# Altium PCB Temp_Sensor_SmallV_8thjune2023.PcbDoc
Units mm, origin at the board's own origin, x right, y up, seen from the top; angles counter-clockwise.
Board outline 18 x 18 mm, 2 copper layers (Top Layer, Bottom Layer); 33 components, 19 nets, 111 pads, 40 vias.
Unrouted connection lines stored in the file: 49.
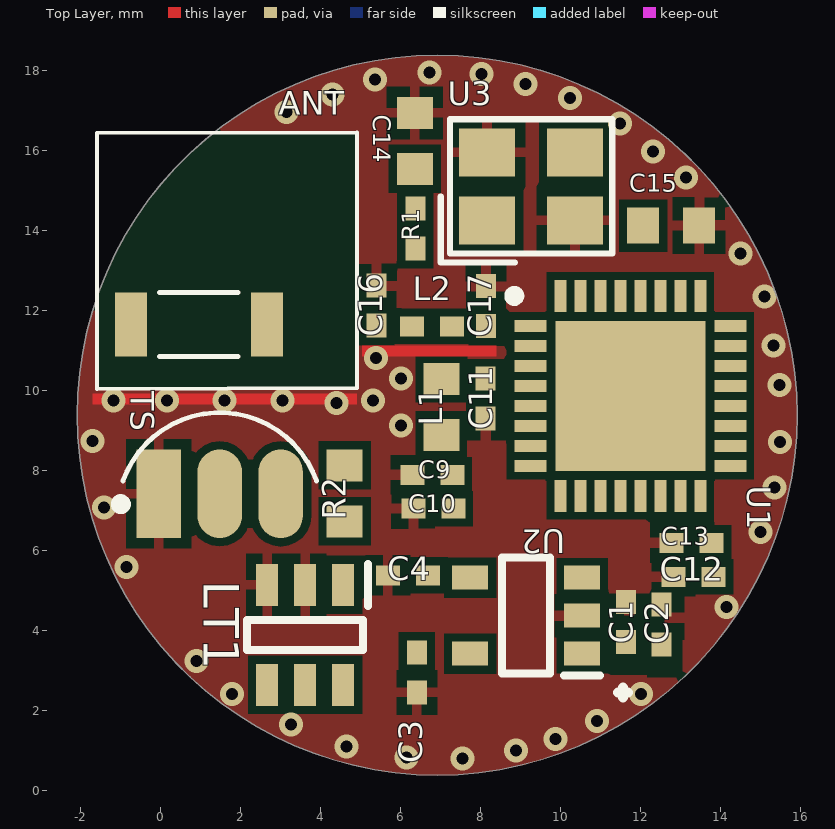
[diagram p0: Top Layer view]
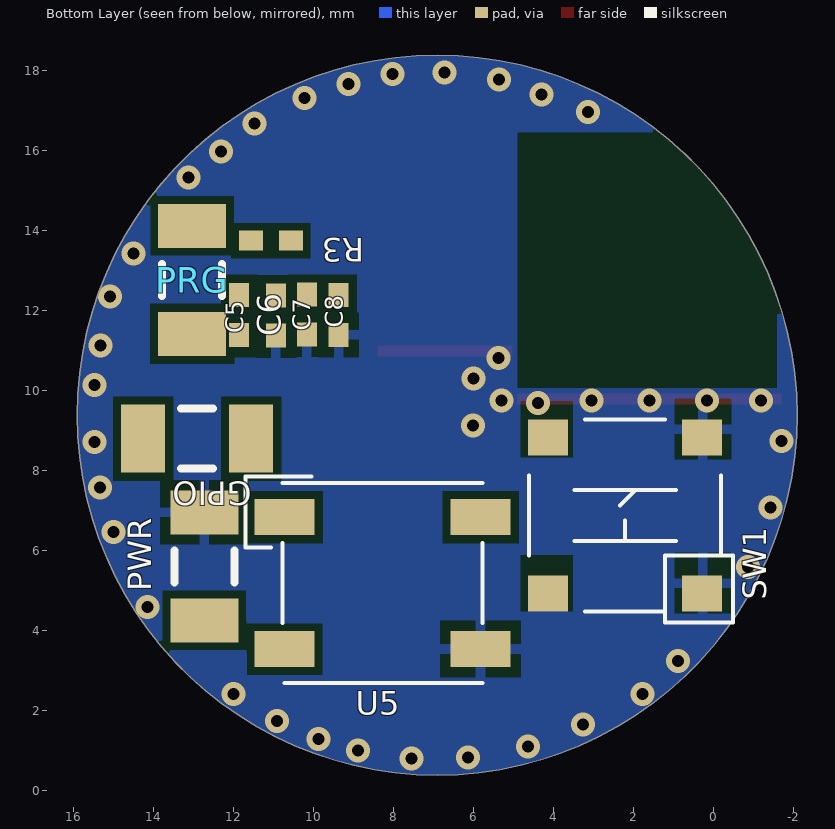
[diagram p1: Bottom Layer view, seen from below]

## Layer stack, top to bottom
Top Solder: solder mask 0.0102, Solder Resist, Dk 3.5
Top Layer: signal copper 0.0356
Dielectric 1: dielectric 0.32, FR-4, Dk 4.8
Bottom Layer: signal copper 0.0356
Bottom Solder: solder mask 0.0102, Solder Resist, Dk 3.5

## Board outline
-2.09,9.39 ccw(c6.91,9.39) 6.91,0.39 ccw(c6.91,9.39) 15.91,9.39 ccw(c6.91,9.39) 6.91,18.39 ccw(c6.91,9.39)

## Design rules (kind name [scope] priority, off if disabled: settings)
Clearance [All] p1: gap=0.2 ignorepadtopadclearanceinfootprint=FALSE except(0: Arc-Hole Track-Hole SMDPad-Hole THPad-Hole Via-Hole Fill-Hole Poly-Hole Region-Hole Text-Hole)
MinimumSolderMaskSliver MinimumSolderMaskSliver_1 [HasFootprint('QFN50P500X500X90-33N-D')] p1: minsoldermaskwidth=0
MinimumSolderMaskSliver [All] p2: minsoldermaskwidth=0
PolygonConnect [All] p1: connectstyle=Relief reliefconductorwidth=0.254 reliefentries=4 polygonreliefangle="90 Angle" airgapwidth=0.254
RoutingVias [All] p1: holewidth=0.711 width=1.27 viastyle="Through Hole" minholewidth=0.711 minwidth=1.27 maxholewidth=0.711 maxwidth=1.27
SilkToSilkClearance [All] p1: silktosilkclearance=0.05
SilkToSolderMaskClearance TO-92-TO92127P495H2044-3 [HasFootprint('TO-92-TO92127P495H2044-3')] p1: minsilkscreentomaskgap=0 clearancetoexposedcopper=TRUE
SilkToSolderMaskClearance [IsPad] p2: minsilkscreentomaskgap=0 clearancetoexposedcopper=TRUE
SolderMaskExpansion [All] p1: expansion=0.102 istentingtop=FALSE
Width [All] p1: maxlimit=0.75 minlimit=0.18 preferedwidth=0.254
27 further rules are at their usual default settings.

## Components (designator, comment, footprint, x,y, rotation, side; value= is the part's Value field where it differs from the comment)
ANT "2.4GHZ" XDCR_2450AT18B100E 2.553,11.653 r180 top
C1 "GRM188C71C225KE11D" 0402-A 11.636,4.221 r270 top value=2.2UF
C2 "GRM188C71C225KE11D" 0402-A 12.524,4.155 r270 top value=2.2UF
C3 "GRM188C71C225KE11D" 0402-A 6.405,2.959 r90 top value=2.2UF
C4 "DNP" 0402 6.18,5.385 r0 top value=100pF
C5 "GRM188C71C225KE11D" 0402-A 11.86,11.897 r90 bottom value=2.2UF
C6 "Cap" 0402-A 10.942,11.884 r90 bottom value=1UF
C7 "Cap" 0402-A 10.168,11.903 r90 bottom value=100NF
C8 "Cap" 0402-A 9.37,11.897 r90 bottom value=100NF
C9 "GRM188C71C225KE11D" 0402-A 6.79,7.899 r0 top value=2.2UF
C10 "Cap" 0402-A 6.814,7.049 r0 top value=100NF
C11 "Cap" 0402-A 8.125,9.802 r90 top value=100NF
C12 "Cap" 0402-A 13.321,5.349 r0 top value=1UF
C13 "Cap" 0402-A 13.274,6.196 r0 top value=100NF
C14 "Cap" 1608[0603] 6.351,16.246 r90 top value=30pF
C15 "Cap" 1608[0603] 12.76,14.13 r0 top value=30pF
C16 "Cap" 0402-A 5.397,12.125 r270 top value=tbd
C17 "Cap" 0402-A 8.134,12.116 r270 top value=tbd
GPIO "Header 2" C1206 12.91,8.8 r180 bottom
L1 "Inductor" 1608[0603] 7.018,9.594 r90 top value=2nH
L2 "Inductor" 0402-A 6.786,11.606 r0 top value=tbd
LT1 "MAX16054AZT+T" SOT95P275X110-6N 3.613,3.896 r270 top
PRG "Header 2" C1206 13.037,12.769 r270 bottom
PWR "Header 2" C1206 12.73,5.611 r90 bottom
R1 "Res1" 0402-A 6.365,14.061 r270 top value=0R
R2 "SCR0603J4K7" 1608[0603] 4.598,7.433 r270 top value=4.7k
R3 "Res1" 0402-A 11.065,13.752 r180 bottom value=1R
SW1 "Tactile Switch" SKRBACE010 2.209,6.877 r0 bottom
TS "DS18B20" TO-92-TO92127P495H2044-3 1.476,7.422 r180 top
U1 "ESP32-C3FN4" QFN50P500X500X90-33N-D 11.739,9.87 r0 top
U2 "XC6210B332MR-G" SOT95P280X130-5N 9.136,4.376 r180 top
U3 "40mhz oscillaltor" CRYSTAL-SMD_4P-L3.2-W2.5-BL 9.259,15.108 r0 top
U5 "ws2812B" COM16346 8.274,5.193 r180 bottom

## Footprints (in the part's own frame and the unit in brackets; to place one, negate y for a bottom-side part, rotate by r counter-clockwise, add the part's x,y. Pads: shape width x height; smd on the part's side, far side on the other; paste and mask are expansions set on the pad)
0402 [mm] "Chip Capacitor, Body 1.0x0.5mm, IPC High Density"
  rect 0.6x0.5 smd: 1(-0.5,0) 2(0.5,0)
  body extent -0.55,-0.3 0.55,0.3, height 1.3
0402-A [mm] "Chip Inductor, Body 1.0x0.5mm, IPC High Density"
  rect 0.6x0.5 smd: 1(-0.5,0) 2(0.5,0)
  body extent -0.55,-0.3 0.55,0.3, height 0.55
1608[0603] [mm] "Chip Capacitor, Body 1.6x0.8mm, IPC High Density"
  rect 0.8x0.9 smd: 1(-0.7,0) 2(0.7,0)
  body extent -0.87,-0.48 0.87,0.48, height 1.3
C1206 [mm] "Chip Capacitor, Body 3.2x1.6mm, IPC High Density"
  rect 1.1x1.7 smd: 1(-1.35,0) 2(1.35,0)
  silkscreen extent -0.4,-0.75 0.4,0.75, body extent -1.7,-0.9 1.7,0.9, height 1.3
COM16346 [mm]
  rect 1.5x0.9 smd: 1(-2.45,1.65) 2(-2.45,-1.65) 3(2.45,-1.65) 4(2.45,1.65)
  silkscreen extent -3.43,-2.5 2.5,2.67, body extent -2.7,-2.5 2.7,2.5, height 1.62
CRYSTAL-SMD_4P-L3.2-W2.5-BL [mm]
  rect 1.4x1.2 smd: 1(-1.1,-0.85) 2(1.1,-0.85) 3(1.1,0.85) 4(-1.1,0.85)
  silkscreen extent -2.26,-1.91 2.03,1.68
QFN50P500X500X90-33N-D [mm]
  rect 0.8x0.3 smd: 1(-2.5,1.75) 2(-2.5,1.25) 3(-2.5,0.75) 4(-2.5,0.25) 5(-2.5,-0.25) 6(-2.5,-0.75) 7(-2.5,-1.25) 8(-2.5,-1.75) 17(2.5,-1.75) 18(2.5,-1.25) 19(2.5,-0.75) 20(2.5,-0.25) 21(2.5,0.25) 22(2.5,0.75) 23(2.5,1.25) 24(2.5,1.75)
  rect 0.3x0.8 smd: 9(-1.75,-2.5) 10(-1.25,-2.5) 11(-0.75,-2.5) 12(-0.25,-2.5) 13(0.25,-2.5) 14(0.75,-2.5) 15(1.25,-2.5) 16(1.75,-2.5) 25(1.75,2.5) 26(1.25,2.5) 27(0.75,2.5) 28(0.25,2.5) 29(-0.25,2.5) 30(-0.75,2.5) 31(-1.25,2.5) 32(-1.75,2.5)
  rect 3.75x3.75 smd: 33(0,0)
  silkscreen extent -3.02,2.38 -2.77,2.62, body extent -2.55,-2.55 2.55,2.55, height 0.9
SKRBACE010 [mm]
  rect 1x0.9 smd: 1(-1.925,1.95) 2(-1.925,-1.95) 3(1.925,1.95) 4(1.925,-1.95)
  silkscreen extent -2.7,-2.4 2.4,2.67, body extent -2.4,-2.4 2.4,2.4, height 0.8
SOT95P275X110-6N [mm]
  rect 1.05x0.55 smd: 1(-1.25,0.95) 2(-1.25,0) 3(-1.25,-0.95) 4(1.25,-0.95) 5(1.25,0) 6(1.25,0.95)
  silkscreen extent -1.78,-1.45 0.38,1.58, body extent -1.38,-1.45 1.38,1.45, height 1.1
SOT95P280X130-5N [mm]
  rect 0.9x0.6 smd: 1(-1.4,0.95) 2(-1.4,0) 3(-1.4,-0.95) 4(1.4,-0.95) 5(1.4,0.95)
  silkscreen extent -1.85,-1.45 0.6,1.5, body extent -1.4,-1.45 1.4,1.45, height 1.3
TO-92-TO92127P495H2044-3 [mm]
  rect 1.11x2.22 smd: 1(1.524,0)
  oval 1.11x2.22 smd: 2(0,-0.002) 3(-1.524,0)
  silkscreen extent -2.42,-2.03 2.6,0.38, body extent -2.29,-1.75 2.28,1.81, height 8.93
XDCR_2450AT18B100E [mm]
  rect 0.8x1.6 smd: 1(-0.1,0) 2(3.3,0)
  Top Layer pour cut-out: -2.344,1.58 -2.355,1.603 -2.321,1.603 4.128,1.603 4.128,-4.76 4.144,-4.776 4.118,-4.802 -2.35,-4.802 -2.35,1.575 -2.355,1.579
  Bottom Layer pour cut-out: -2.35,1.59 4.116,1.59 4.133,1.607 4.151,1.59 4.151,-4.786 4.128,-4.81 -2.35,-4.81 -2.35,1.583 -2.355,1.587
  silkscreen extent -2.36,-4.8 4.15,1.61, body extent 0,-0.8 3.2,0.8, height 1.45

## Part data
ANT: library part Antenna, "Generic Antennals", ComponentLink1Description="Antenna digi key", ComponentLink1URL=https://www.digikey.com/en/products/detail/johanson-technology-inc/2450AT18B100E/1560677, ComponentLink2Description=LCSC, ComponentLink2URL=https://www.lcsc.com/product-detail/Antennas_Johanson-Dielectrics-2450AT18B100E_C2917717.html, ComponentLink3Description=C2917717, ComponentLink3URL=C2917717, LatestRevisionDate=17-Jul-2002, LatestRevisionNote="Re-released for DXP Platform.", PackageReference=PIN1, Published=24-Mar-1999, Publisher="Altium Limited"
C1 C2 C3 C5 C9: library part Cap, "16V 2.2uF X6S ±10% 0402 Multilayer Ceramic Capacitors MLCC - SMD/SMT ROHS", LCSC=C437523, LatestRevisionDate=17-Jul-2002, LatestRevisionNote="Re-released for DXP Platform.", PackageDescription="Radial Cap, Thru-Hole; 2 Leads; 0.3 in Pin Spacing", PackageReference=RAD-0.3, Published=8-Jun-2000, Publisher="Altium Limited"
C4: library part Cap, "Capacitor", LatestRevisionDate=17-Jul-2002, LatestRevisionNote="Re-released for DXP Platform.", LCSC=DNP, PackageDescription="Radial Cap, Thru-Hole; 2 Leads; 0.3 in Pin Spacing", PackageReference=RAD-0.3, Published=8-Jun-2000, Publisher="Altium Limited"
C6 C12: "35V 1uF ±10% 0402 Multilayer Ceramic Capacitors MLCC - SMD/SMT ROHS", LCSC=C968773, LatestRevisionDate=17-Jul-2002, LatestRevisionNote="Re-released for DXP Platform.", PackageDescription="Radial Cap, Thru-Hole; 2 Leads; 0.3 in Pin Spacing", PackageReference=RAD-0.3, Published=8-Jun-2000, Publisher="Altium Limited"
C7 C8 C10 C11 C13: "50V 100nF X7R ±10% 0402 Multilayer Ceramic Capacitors MLCC - SMD/SMT ROHS", LCSC=C131394, LatestRevisionDate=17-Jul-2002, LatestRevisionNote="Re-released for DXP Platform.", PackageDescription="Radial Cap, Thru-Hole; 2 Leads; 0.3 in Pin Spacing", PackageReference=RAD-0.3, Published=8-Jun-2000, Publisher="Altium Limited"
C14 C15: "Capacitor", LCSC=C1658, LatestRevisionDate=17-Jul-2002, LatestRevisionNote="Re-released for DXP Platform.", PackageDescription="Radial Cap, Thru-Hole; 2 Leads; 0.3 in Pin Spacing", PackageReference=RAD-0.3, Published=8-Jun-2000, Publisher="Altium Limited"
C16 C17: "Capacitor", LatestRevisionDate=17-Jul-2002, LatestRevisionNote="Re-released for DXP Platform.", PackageDescription="Radial Cap, Thru-Hole; 2 Leads; 0.3 in Pin Spacing", PackageReference=RAD-0.3, Published=8-Jun-2000, Publisher="Altium Limited"
GPIO PRG PWR: "Header, 2-Pin", LCSC=DNP, LatestRevisionDate=17-Jul-2002, LatestRevisionNote="Re-released for DXP Platform.", Publisher="Altium Limited"
L1: LCSC=C395081, Code_IEC=1005, Code_JEITA=0402, LatestRevisionDate=29-May-2009, LatestRevisionNote="IPC-7351 Footprint Added.", PackageDescription="Chip Inductor", PackageReference=0402-A, Published=8-Jun-2000, Publisher="Altium Limited"
LT1: LCSC=C79401
R1: "62.5mW Thick Film Resistors ±800ppm/℃ ±1% 0Ω 0402 Chip Resistor - Surface Mount ROHS", LCSC=C17168, LatestRevisionDate=17-Jul-2002, LatestRevisionNote="Re-released for DXP Platform.", PackageDescription="Axial Device, Thru-Hole; 2 Leads; 0.3 in Pin Spacing", PackageReference=AXIAL-0.3, Published=8-Jun-2000, Publisher="Altium Limited"
R2: library part Res1, "±5% 4.7kΩ 0603 Chip Resistor - Surface Mount ROHS", LCSC=C3017722, LatestRevisionDate=17-Jul-2002, LatestRevisionNote="Re-released for DXP Platform.", PackageDescription="Axial Device, Thru-Hole; 2 Leads; 0.3 in Pin Spacing", PackageReference=AXIAL-0.3, Published=8-Jun-2000, Publisher="Altium Limited"
R3: "62.5mW Thick Film Resistors ±1% ±200ppm/℃ 1Ω 0402 Chip Resistor - Surface Mount ROHS", LCSC=C25086, LatestRevisionDate=17-Jul-2002, LatestRevisionNote="Re-released for DXP Platform.", PackageDescription="Axial Device, Thru-Hole; 2 Leads; 0.3 in Pin Spacing", PackageReference=AXIAL-0.3, Published=8-Jun-2000, Publisher="Altium Limited"
SW1: LCSC=C139789
TS: "Temperature Sensor Digital, Local -55Â°C ~ 125Â°C 12 b TO-92-3", LCSC=DNP, Package="TO-92 Maxim Integrated", Availability=Unavailable, MF="Maxim Integrated", MP=DS18B20, PRICE=None, SnapEDA_Link=https://www.snapeda.com/parts/DS18B20/Maxim%20Integrated/view-part/1266091/?ref=snap
U1: library part ESP32-C3F, LCSC=C5143572
U2: "700mA 60dB@(1kHz) Fixed 3.3V~3.3V Positive 6V SOT-25 Linear Voltage Regulators (LDO) ROHS", LCSC=C47719
U3: "C3003278", LCSC=C3003278
U5: "RGB SMD5050 Light Emitting Diodes (LED) ROHS", LCSC=C114586
L2: Code_IEC=1005, Code_JEITA=0402, LatestRevisionDate=29-May-2009, LatestRevisionNote="IPC-7351 Footprint Added.", PackageDescription="Chip Inductor", PackageReference=0402-A, Published=8-Jun-2000, Publisher="Altium Limited"

## Via types
v1: diameter 0.6, hole 0.3, Top Layer to Bottom Layer, tented both sides, 40 vias

## Nets (pads, with @x,y where several pads share a name; then routed paths per layer and width w, separated by ;. In a path a pad name is that pad's centre, name@x,y a point inside that pad or via, vN(x,y) a via of type N, cw(c..) or ccw(c..) an arc to the next point about the centre after c; other vN are vias at no path point)
3.3_VCC: C3.2 C5.2 C6.2 C7.2 C8.2 C9.2 C10.2 C12.2 C13.2 L1.1 R2.1 TS.3 U1.7 U1.11 U1.17 U1.31 U1.32 U2.5 U5.1
CE: LT1.5 U2.3
GND: C1.1 C2.1 C3.1 C4.1 C5.1 C6.1 C7.1 C8.1 C9.1 C10.1 C11.1 C12.1 C13.1 C14.2 C15.2 C16.1 C17.1 LT1.2 LT1.3 PWR.2 SW1.2 SW1.4 TS.1 U1.33 U2.2 U3.2 U3.4 U5.3
  other v1: 7.55,0.8 6.14,0.83 8.887,1.009 4.64,1.1 9.87,1.297 3.26,1.65 10.91,1.74 1.778,2.418 12.004,2.422 0.89,3.24 14.145,4.589 -0.86,5.59 15,6.47 -1.42,7.08 15.34,7.58 15.48,8.72 -1.701,8.746 6.011,9.13 4.389,9.694 -1.182,9.757 3.05,9.75 5.301,9.755 0.16,9.76 1.6,9.76 15.47,10.14 6.002,10.31 5.377,10.813 15.32,11.13 15.09,12.36 14.5,13.43 13.127,15.327 12.31,15.98 11.48,16.684 3.14,16.97 10.227,17.315 4.3,17.41 9.12,17.67 5.36,17.78 8.02,17.92 6.72,17.96
GPIO8: GPIO.2 U1.14
GPIO9: GPIO.1 U1.15
LED_PIN: U1.8 U5.4
NetANT_1: ANT.1 C16.2 L2.1
NetC4_2: C4.2 U2.4
NetC11_2: C11.2 L1.2 U1.2 U1.3
NetC14_1: C14.1 R1.1 U3.1
NetC15_1: C15.1 U1.29 U3.3
NetC17_2: C17.2 L2.2 U1.1
NetLT1_1: LT1.1 SW1.1 SW1.3
NetR1_2: R1.2 U1.30
NetR3_2: R3.2 U1.28
RX: PRG.2 U1.27
T1: R2.2 TS.2 U1.4
TX: PRG.1 R3.1
VIN: C1.2 C2.2 LT1.6 PWR.1 U2.1
pads on no net: ANT.2 LT1.4 U1.5 U1.6 U1.9 U1.10 U1.12 U1.13 U1.16 U1.18 U1.19 U1.20 U1.21 U1.22 U1.23 U1.24 U1.25 U1.26 U5.2

## Polygon pours and split planes (outlines as drawn)
GND on Top Layer "GND_L01_P000" (solid, pour order 0): -2.09,9.39 ccw(c6.91,9.39) 6.91,0.39 ccw(c6.91,9.39) 15.91,9.39 ccw(c6.91,9.39) 6.91,18.39 ccw(c6.91,9.39)
GND on Bottom Layer "GND_L02_P001" (solid, pour order 1): -2.09,9.39 ccw(c6.91,9.39) 6.91,0.39 ccw(c6.91,9.39) 15.91,9.39 ccw(c6.91,9.39) 6.91,18.39 ccw(c6.91,9.39)

## Other copper
Top Layer:
  rectangle net GND: -1.7,9.651 4.908,9.932
  rectangle net GND: 5.029,10.851 8.4,11.132

## Silkscreen, mask and mechanical layers (free items; w line width, h text height)
Top Overlay:
  lines w0.25: 11.433,2.46 11.682,2.454 ; 11.554,2.332 11.561,2.581
BOARD_OUTLINE:
  circle w0.254: c6.91,9.39 r9
Drill Drawing:
  lines w0.254: -6.79,24.153 -5.097,24.153 -5.097,25.847 -6.79,25.847 -6.79,24.153
  lines w0.381: -8.309,23.01 316.162,23.01 ; -8.309,26.82 316.162,26.82 ; 5.683,19.2 5.683,30.63 ; 19.396,19.2 19.396,30.63 ; 46.566,19.2 46.566,30.63 ; 59.415,19.2 59.415,30.63 ; 78.054,19.2 78.054,30.63 ; 116.142,19.2 116.142,30.63 ; 131.125,19.2 131.125,30.63 ; 150.068,19.2 150.068,30.63 ; 169.113,19.2 169.113,30.63 ; 190.798,19.2 190.798,30.63 ; 224.672,19.2 224.672,30.63 ; 258.546,19.2 258.546,30.63 ; 280.536,19.2 280.536,30.63 ; -8.309,19.2 316.162,19.2 316.162,30.63 -8.309,30.63 -8.309,19.2
  text "Symbol" at -6.023,27.963 h1.83
  text "Count" at 6.826,27.963 h1.83
  text "Hole Size" at 20.539,27.963 h1.83
  text "Plated" at 47.709,27.963 h1.83
  text "Hole Type" at 60.558,27.963 h1.83
  text "Drill Layer Pair" at 79.197,27.963 h1.83
  text "Via/Pad" at 117.285,27.963 h1.83
  text "Pad Shape" at 132.268,27.963 h1.83
  text "Template" at 151.211,27.963 h1.83
  text "Description" at 170.256,27.963 h1.83
  text "Hole Tolerance (+)" at 191.941,27.963 h1.83
  text "Hole Tolerance (-)" at 225.815,27.963 h1.83
  text "Hole Length" at 259.689,27.963 h1.83
  text "Routed Path Length" at 281.679,27.963 h1.83
  text "40" at 6.826,24.153 h1.52
  text "11.81mil (0.300mm)" at 20.539,24.153 h1.52
  text "PTH" at 47.709,24.153 h1.52
  text "Round" at 60.558,24.153 h1.52
  text "Top Layer - Bottom Layer" at 79.197,24.153 h1.52
  text "Via" at 117.285,24.153 h1.52
  text "Rounded" at 132.268,24.153 h1.52
  text "v60h30m0mx0" at 151.211,24.153 h1.52
  text "-" at 259.689,24.153 h1.52
  text "-" at 281.679,24.153 h1.52
  text "40 Total" at 6.826,20.343 h1.52